# Allegro board PLL_VCO.brd
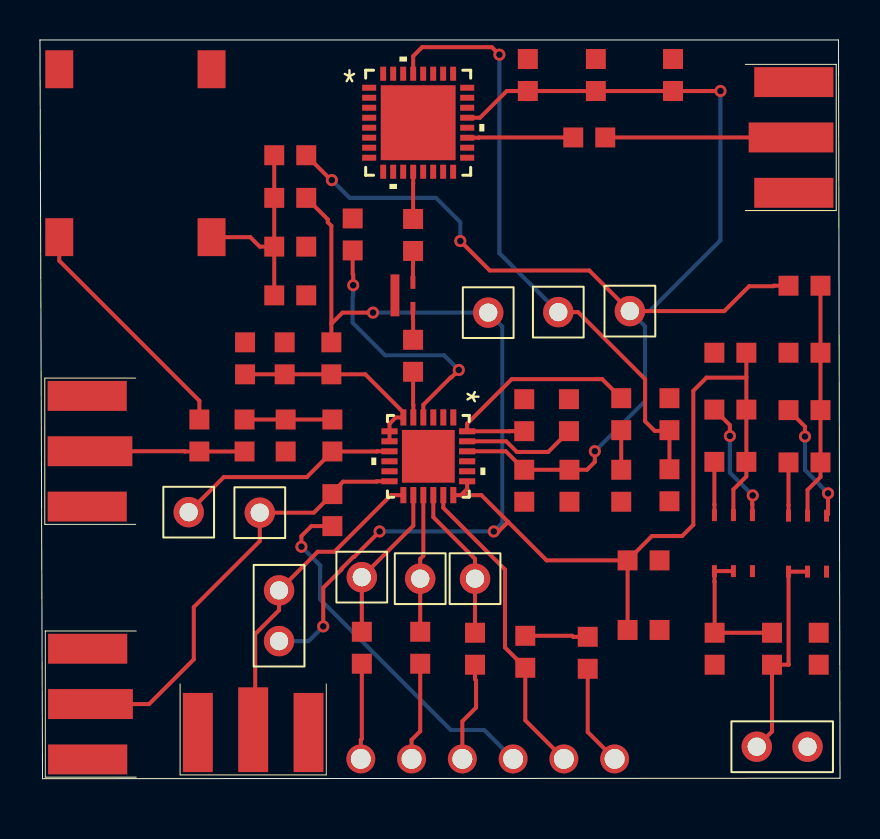
[diagram p0: board, top side]
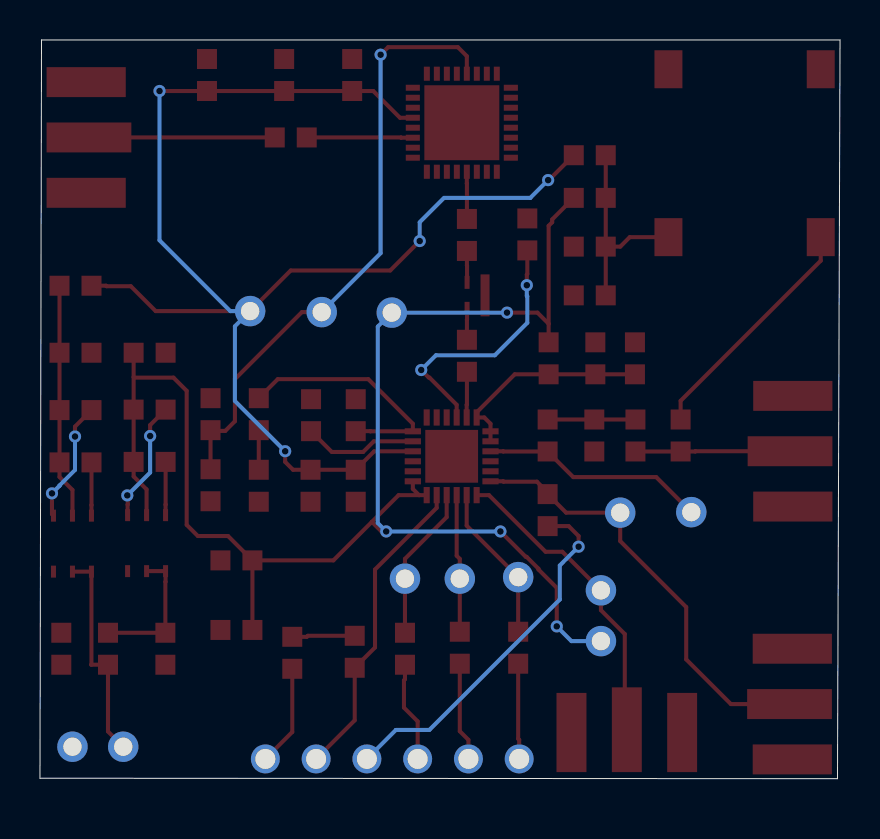
[diagram p1: board, bottom side, seen from below]

Outline 40.03 x 36.96 mm; copper layers: TOP, BOTTOM. Coordinates in mm from the lower left corner of the outline.
Outline path: 0,36.96 39.95,36.96 40.03,0.03 0.13,0 0,36.96

## Placement (name value [footprint] x y rotation side)
C1  100pF  [CAPC1608N]  18.67 21.16 90 top
C2  0.1uF  [CAPC1608N]  12.24 21.03 270 top
C3  22uF  [CAPC1608N]  24.41 35.2 90 top
C4  100pF  [CAPC1608N]  15.65 27.23 90 top
C5  10pF  [CAPC1608N]  10.26 21.03 270 top
C6  1nF  [CAPC1608N]  27.81 35.2 90 top
C7  1nF  [CAPC1608N]  10.24 17.17 90 top
C8  1nF  [CAPC1608N]  14.63 17.17 270 top
C9  50.8nF  [CAPC1608N]  31.5 14.68 90 top
C10  11nF  [CAPC1608N]  24.23 18.19 270 top
C11  100pF  [CAPC1608N]  31.67 35.2 90 top
C12  1.51uF  [CAPC1608N]  29.08 14.66 90 top
C13  10nF  [CAPC1608N]  12.52 24.18 180 top
C14  10nF  [CAPC1608N]  12.52 26.62 180 top
C15  0.1uF  [CAPC1608N]  26.49 14.66 270 top
C16  100pF  [CAPC1608N]  27.48 32.08 0 top
C17  CAP  [CAPC1608N]  24.23 14.66 270 top
C18  CAP  [CAPC1608N]  30.2 10.92 0 top
C19  100pF  [CAPC1608N]  18.67 27.2 270 top
C20  CAP  [CAPC1608N]  30.2 7.44 0 top
C21  10nF  [CAPC1608N]  34.54 18.47 0 top
C22  4.7uF  [CAPC1608N]  34.54 21.31 0 top
C23  1uF  [CAPC1608N]  33.76 6.5 90 top
C24  10nF  [CAPC1608N]  38.25 18.44 0 top
C25  4.7uF  [CAPC1608N]  38.25 21.31 0 top
C26  1uF  [CAPC1608N]  38.96 6.5 270 top
J1  CON3  [SMA_AMPHENOL_S]  4.62 16.38 180 top
J2  CON3  [SMA_AMPHENOL_S]  35.46 32.08 0 top
J3  CON3  [SMA_AMPHENOL_S]  4.65 3.73 180 top
J4  HEADER 6  [JUMPER6]  22.4 0.99 0 top
J5  JUMPER1  [JUMPER2]  11.96 9.42 270 top
J8  CON3  [SMA_AMPHENOL_S]  10.67 4.57 270 top
J9  HEADER 2  [JUMPER2]  35.86 1.6 0 top
R1  0  [CAPC1608N]  14.58 21.03 90 top
R2  60.1  [CAPC1608N]  31.5 18.24 270 top
R3  29.4  [CAPC1608N]  29.08 18.24 90 top
R4  0  [CAPC1608N]  7.98 17.17 270 top
R5  51  [CAPC1608N]  12.29 17.17 90 top
R6  4.7K  [CAPC1608N]  26.47 18.19 90 top
R7  0  [CAPC1608N]  12.52 29.06 180 top
R8  0  [CAPC1608N]  12.52 31.19 180 top
R9  0  [CAPC1608N]  14.63 13.44 90 top
R10  330  [CAPC1608N]  16.1 6.55 90 top
R11  330  [CAPC1608N]  19.02 6.55 90 top
R12  330  [CAPC1608N]  21.77 6.5 90 top
R13  0  [CAPC1608N]  24.28 6.35 270 top
R14  10k  [CAPC1608N]  27.41 6.3 90 top
R15  0  [CAPC1608N]  36.63 6.5 90 top
R16  330  [CAPC1608N]  34.54 15.85 0 top
R17  0  [CAPC1608N]  38.25 24.66 180 top
R18  330  [CAPC1608N]  38.25 15.82 0 top
TP1  TEST POINT  [JUMPER1]  25.93 23.34 0 top
TP2  TEST POINT  [JUMPER1]  7.44 13.33 0 top
TP3  TEST POINT  [JUMPER1]  11 13.31 0 top
TP4  TEST POINT  [JUMPER1]  16.1 10.08 0 top
TP5  TEST POINT  [JUMPER1]  19.02 10.01 0 top
TP6  TEST POINT  [JUMPER1]  21.77 10.01 0 top
TP8  TEST POINT  [JUMPER1]  22.43 23.32 0 top
TP9  TEST POINT  [JUMPER1]  29.51 23.39 0 top
U1  PAT129  [PAT2012]  18.16 24.18 270 top
U2  ADF4158  [CP_24_7]  19.43 16.13 270 top
U3  ADP3300  [SMP6_1_9R2_8]  34.7 11.79 0 top
U4  ADP3300  [SMP6_1_9R2_8]  38.4 11.76 0 top
VCO1  hmc509  [HCP_32_1]  18.92 32.82 0 top
Y1  Fox801  [FOX801]  4.78 31.29 90 top

## Library data of the parts
C1-C26 = CAP
J1-J3 J8 = CON3
J4 = HEADER 6
J5 = JUMPER1: User Part Number: ***
J9 = HEADER 2: User Part Number: ***
R1-R18 = RES
TP1-TP6 TP8 TP9 = TEST POINT: User Part Number: ***
U1 = PAT129
U2 = ADF4158
U3 U4 = ADP3300
VCO1 = hmc509
Y1 = Fox801

## Footprints (pads in the part's own frame, mm; a bottom-side part is the same pattern mirrored in y, then rotated)
CAPC1608N
  rect 1x1 smd: 1(-0.8,0) 2(0.8,0)
CP_24_7
  rect 0.813x0.305 smd: 1(-1.943,1.25) 2(-1.943,0.75) 3(-1.943,0.25) 4(-1.943,-0.25) 5(-1.943,-0.75) 6(-1.943,-1.25) 13(1.943,-1.25) 14(1.943,-0.75) 15(1.943,-0.25) 16(1.943,0.25) 17(1.943,0.75) 18(1.943,1.25)
  rect 0.305x0.813 smd: 7(-1.25,-1.943) 8(-0.75,-1.943) 9(-0.25,-1.943) 10(0.25,-1.943) 11(0.75,-1.943) 12(1.25,-1.943) 19(1.25,1.943) 20(0.75,1.943) 21(0.25,1.943) 22(-0.25,1.943) 23(-0.75,1.943) 24(-1.25,1.943)
  rect 2.642x2.642 smd: 25(0,0)
FOX801
  rect 1.9x1.4 smd: 1(4.2,-3.81) 2(4.2,3.81) 3(-4.2,3.81) 4(-4.2,-3.81)
HCP_32_1
  rect 0.705x0.3 smd: 1(-2.452,1.75) 2(-2.452,1.25) 3(-2.452,0.75) 4(-2.452,0.25) 5(-2.452,-0.25) 6(-2.452,-0.75) 7(-2.452,-1.25) 8(-2.452,-1.75) 17(2.452,-1.75) 18(2.452,-1.25) 19(2.452,-0.75) 20(2.452,-0.25) 21(2.452,0.25) 22(2.452,0.75) 23(2.452,1.25) 24(2.452,1.75)
  rect 0.3x0.705 smd: 9(-1.75,-2.452) 10(-1.25,-2.452) 11(-0.75,-2.452) 12(-0.25,-2.452) 13(0.25,-2.452) 14(0.75,-2.452) 15(1.25,-2.452) 16(1.75,-2.452) 25(1.75,2.452) 26(1.25,2.452) 27(0.75,2.452) 28(0.25,2.452) 29(-0.25,2.452) 30(-0.75,2.452) 31(-1.25,2.452) 32(-1.75,2.452)
  rect 3.75x3.75 smd: 33(0,0)
JUMPER1
  round 1.524 hole 0.914: 1(0,0)
JUMPER2
  round 1.524 hole 0.914: 1(0,0) 2(2.54,0)
JUMPER6
  round 1.45 hole 1: 1(-6.35,0) 2(-3.81,0) 3(-1.27,0) 4(1.27,0) 5(3.81,0) 6(6.35,0)
PAT2012
  rect 0.65x0.25 smd: 1(-0.65,0.5) 2(0.65,0.5)
  rect 2.1x0.45 smd: 3(0,-0.4)
SMA_AMPHENOL_S
  rect 3.962x1.499 smd: 1(2.261,2.769) 3(2.261,-2.769)
  rect 4.242x1.499 smd: 2(2.121,0)
SMP6_1_9R2_8
  rect 0.25x0.6 smd: 1(-0.95,-1.4) 2(0,-1.4) 3(0.95,-1.4) 4(0.95,1.4) 5(0,1.4) 6(-0.95,1.4)

## Nets
+3V: C18.1(A) C20.1(A) C21.2(B) C22.2(B) J5.2 R1.2(B) R7.1(A) R16.2(B) TP8.1 U2.18(SDVDD) U2.19(DVDD) U3.5(IN)
+5V: C3.1(A) C6.1(A) C11.1(A) C15.1(A) C17.1(A) R8.1(A) R17.2(B) TP9.1 U2.22(VP) VCO1.21(VCC)
+12V: C26.2(B) J9.1 R15.1(A) U4.1(GND) U4.2(NR)
GND: C2.1(A) C3.2(B) C4.2(B) C5.1(A) C6.2(B) C9.1(A) C10.1(A) C11.2(B) C12.1(A) C13.1(A) C14.1(A) C15.2(B) C17.2(B) C18.2(B) C20.2(B) C22.1(A) C23.1(A) C25.1(A) C26.1(A) J1.1 J1.3 J2.1 J2.3 J3.1 J3.3 J8.1 J8.3 J9.2 R5.1(A) R6.2(B) U1.3(GND) U2.1(CPGND) U2.2(AGND1) U2.3(AGND2) U2.10(DGND) U2.11(SDGND) U2.25(GND) U3.3(SD) U4.3(SD) VCO1.5(GND5) Y1.2(GND)
VDD: J4.6 R14.1(A)
CLK: J4.1 R10.1(A)
DATA: J4.2 R11.1(A)
LE: J4.3 R12.1(A)
MUXOUT: J4.5 R13.2(B) U2.17(MUXOUT)
RF_OUT: C16.2(B) J2.2
TXDATA: J4.4 R9.1(A)
N26468: C24.1(A) U4.4(ERR)
N26532: C10.2(B) R2.1(A) R3.2(B) U2.24(CP)
N26536: C24.2(B) C25.2(B) R17.1(A) R18.2(B) U4.5(IN)
N26556: R18.1(A) U4.6(OUT)
N27202: C9.2(B) R2.2(B) TP1.1 VCO1.29(VTUNE)
N27376: C19.2(B) U1.1(IN)
N27432: C1.1(A) U2.5(RFINA)
N27440: C1.2(B) U1.2(OUT)
N27536: C4.1(A) U2.4(RFINB)
N27608: R13.1(A) R14.2(B)
N27786: R6.1(A) U2.23(RSET)
N27912: R12.2(B) TP6.1 U2.16(LE)
N27924: R11.2(B) TP5.1 U2.15(DATA)
N27936: R10.2(B) TP4.1 U2.14(CLK)
N28072: J3.2 R9.2(B) TP3.1 U2.12(TXDATA)
N28132: C8.2(B) TP2.1 U2.9(REFIN)
N28158: C7.2(B) C8.1(A) R5.2(B)
N28170: C7.1(A) J1.2 R4.2(B)
N28198: R4.1(A) Y1.3(OUT)
N28210: C13.2(B) C14.2(B) R7.2(B) R8.2(B) Y1.4(VDD)
N28334: J5.1 J8.2 U2.13(CE)
N28420: C2.2(B) C5.2(B) R1.1(A) U2.6(AVDD) U2.7(AVDD1) U2.8(AVDD2)
N28710: C19.1(A) VCO1.12(RFOUT/2)
N28718: C16.1(A) VCO1.19(RFOUT)
N28824: C23.2(B) R15.2(B) U3.1(GND) U3.2(NR)
N28882: C21.1(A) U3.4(ERR)
N28906: R16.1(A) U3.6(OUT)
N265881: C12.2(B) R3.1(A)

Pads without a net: U2 20 21; VCO1 1 2 3 4 6 7 8 9 10 11 13 14 15 16 17 18 20 22 23 24 25 26 27 28 30 31 32 33; Y1 1

## Via types
v1: diameter 0.61, hole 0.33, TOP to BOTTOM, 16 vias

## Routing (per net, layer and track width the routed paths; a pad name or vN(x,y) marks a point on that pad's centre or on a via; arc(x,y) is an arc through that point)
+3V: length 78.9
  TOP w0.203: 21.06,14.19 U2.18 ; 21.06,14.19 22.09,14.19 23.42,12.85 ; 21.06,14.19 21.37,14.5 U2.19 ; 35.34,20.09 C21.2 R16.2 35.34,15.12 34.7,14.47 U3.5 34.7,13.01 ; 35.34,20.09 C22.2 ; 35.34,20.09 35.32,20.07 33.35,20.07 32.69,19.41 32.69,12.7 32.13,12.14 30.62,12.14 C18.1 ; 23.42,12.85 22.94,12.37 v1(22.71,12.37) ; 23.42,12.85 25.35,10.92 C18.1 ; R1.2 14.58,22.76 ; 14.58,22.76 14.58,27.66 14.4,27.84 14.4,27.98 R7.1 ; 14.58,22.76 15.14,23.32 v1(16.66,23.32) ; C18.1 C20.1 ; v1(16.99,12.37) 15.72,11.1 15.68,11.1 15.09,10.5 15.09,10.46 14.17,9.55 v1(14.17,7.62)
  BOTTOM w0.203: J5.2 13.44,6.88 v1(14.17,7.62) ; v1(16.99,12.37) v1(22.71,12.37) 23.13,12.79 23.13,22.62 TP8.1 v1(16.66,23.32)
+5V: length 71
  TOP w0.203: v1(27.76,16.38) 27.76,15.85 27.37,15.46 C15.1 C17.1 23.31,16.38 U2.22 ; R8.1 14.57,29.95 v1(14.61,29.95) ; VCO1.21 22.02,33.07 23.36,34.4 C3.1 C6.1 C11.1 v1(34.05,34.4) ; v1(21.03,26.9) 22.5,25.43 27.48,25.43 TP9.1 34.24,23.39 35.48,24.64 36.7,24.64 36.72,24.66 R17.2
  BOTTOM w0.203: v1(27.76,16.38) 30.28,18.9 30.28,22.63 TP9.1 30.51,23.39 34.05,26.94 v1(34.05,34.4) ; v1(21.03,26.9) 21.03,27.84 19.81,29.06 15.49,29.06 v1(14.61,29.95)
+12V: length 10.9
  TOP w0.203: J9.1 36.63,2.36 R15.1 37.47,5.7 37.45,5.71 U4.1 U4.2
VDD: length 5.1
  TOP w0.203: J4.6 27.41,2.34 R14.1
CLK: length 4.8
  TOP w0.203: J4.1 16.05,1.94 16.1,2 R10.1
DATA: length 4.9
  TOP w0.203: R11.1 19.02,2.38 18.59,1.94 J4.2
LE: length 5
  TOP w0.203: R12.1 21.77,4.97 21.82,4.92 21.82,3.56 21.13,2.87 J4.3
MUXOUT: length 15.7
  TOP w0.203: U2.17 20.18,13.55 23.27,10.47 23.27,6.57 R13.2 24.28,2.92 J4.5
RF_OUT: length 9.3
  TOP w0.203: C16.2 J2.2
TXDATA: length 18.3
  TOP w0.203: v1(13.08,11.61) 13.08,12.14 13.58,12.64 R9.1
  BOTTOM w0.203: J4.4 22.23,2.44 20.55,2.44 14.02,8.97 14.02,10.67 v1(13.08,11.61)
N26468: length 6.1
  TOP w0.203: v1(39.43,14.28) 39.43,13.24 U4.4 ; v1(38.28,17.12) 38.28,17.61 C24.1
  BOTTOM w0.203: v1(39.43,14.28) 39.05,14.65 39.05,14.67 38.28,15.44 v1(38.28,17.12)
N26532: length 12.3
  TOP w0.203: C10.2 23.5,17.39 23.5,17.38 U2.24 21.37,17.76 23.6,19.99 28.13,19.99 R3.2
N26536: length 11.8
  TOP w0.203: R17.1 C25.2 C24.2 R18.2 39.05,15.1 38.4,14.45 U4.5
N26556: length 2.7
  TOP w0.203: U4.6 37.45,13.69 37.45,13.69 R18.1
N27202: length 30.9
  TOP w0.203: C9.2 R2.2 31.46,17.4 30.76,17.4 30.28,17.88 30.28,19.99 26.92,23.34 TP1.1 ; v1(22.99,36.22) 22.61,36.6 19.12,36.6 18.67,36.15 VCO1.29
  BOTTOM w0.203: v1(22.99,36.22) 22.99,26.29 TP1.1
N27376: length 1.6
  TOP w0.203: C19.2 18.67,25.67 18.66,25.67 U1.1
N27432: length 2.3
  TOP w0.203: C1.1 18.67,18.72 18.68,18.71 U2.5
N27440: length 1.6
  TOP w0.203: U1.2 18.66,22.98 18.67,22.97 C1.2
N27536: length 13.1
  TOP w0.203: v1(20.96,20.45) 20.58,20.07 20.54,20.07 19.18,18.71 U2.4 ; C4.1 15.65,25.25 15.67,25.22 v1(15.67,24.69)
  BOTTOM w0.203: v1(20.96,20.45) 20.22,21.18 17.27,21.18 15.65,22.81 15.65,24.13 15.67,24.16 v1(15.67,24.69)
N27608: length 3.1
  TOP w0.203: R13.1 26.63,7.15 26.68,7.1 R14.2
N27786: length 5.7
  TOP w0.203: R6.1 25.43,16.34 23.86,16.34 23.33,16.88 U2.23
N27912: length 7.7
  TOP w0.203: R12.2 TP6.1 21.77,11 19.68,13.09 U2.16
N27924: length 6.9
  TOP w0.203: R11.2 TP5.1 19.02,11 19.18,11.15 U2.15
N27936: length 7.9
  TOP w0.203: R10.2 TP4.1 18.68,12.66 U2.14
N28072: length 22
  TOP w0.203: U2.12 16.85,14.88 16.83,14.86 15.16,14.86 14.63,14.33 R9.2 13.7,13.31 TP3.1 11,11.89 7.7,8.59 7.7,5.97 5.46,3.73 J3.2
N28132: length 11.3
  TOP w0.203: TP2.1 9.19,15.09 13.35,15.09 C8.2 16.84,16.37 16.85,16.38 U2.9
N28158: length 4.4
  TOP w0.203: C8.1 R5.2 C7.2
N28170: length 7.7
  TOP w0.203: C7.1 R4.2 7.25,16.37 7.23,16.38 J1.2
N28198: length 12
  TOP w0.203: Y1.3 0.97,25.91 7.98,18.9 R4.1
N28210: length 10.3
  TOP w0.203: Y1.4 10.52,27.09 10.99,26.62 C14.2 ; C14.2 R7.2 R8.2 ; C14.2 C13.2
N28334: length 15.7
  TOP w0.203: U2.13 17.56,14.19 14.73,11.35 13.89,11.35 J5.1 11.96,8.43 10.77,7.24 10.77,2.55 J8.2
N28420: length 10.7
  TOP w0.203: C5.2 C2.2 R1.1 16.28,20.23 18.18,18.33 U2.6 17.8,18.07 17.49,17.76 U2.7 U2.8
N28710: length 2.4
  TOP w0.203: C19.1 18.67,29.78 18.67,29.78 VCO1.12
N28718: length 5.3
  TOP w0.203: C16.1 21.97,32.08 21.96,32.07 VCO1.19
N28824: length 6.9
  TOP w0.203: R15.2 C23.2 33.76,9.85 33.75,9.86 U3.1 U3.2
N28882: length 6.1
  TOP w0.203: v1(35.66,14.17) 35.64,14.15 35.64,13.72 35.65,13.71 U3.4 ; C21.1 34.52,17.69 v1(34.52,17.14)
  BOTTOM w0.203: v1(34.52,17.14) 34.52,15.32 v1(35.66,14.17)
N28906: length 2.7
  TOP w0.203: R16.1 33.74,13.72 33.75,13.71 U3.6
N265881: length 2
  TOP w0.203: R3.1 C12.2
